# Altium PCB USB_nRF24L01_gateway.PcbDoc
Units mil, origin at the board's own origin, x right, y up, seen from the top; angles counter-clockwise.
Board outline 1771.65 x 787.4 mil, 2 copper layers (Top Layer, Bottom Layer); 36 components, 39 nets, 158 pads, 28 vias.
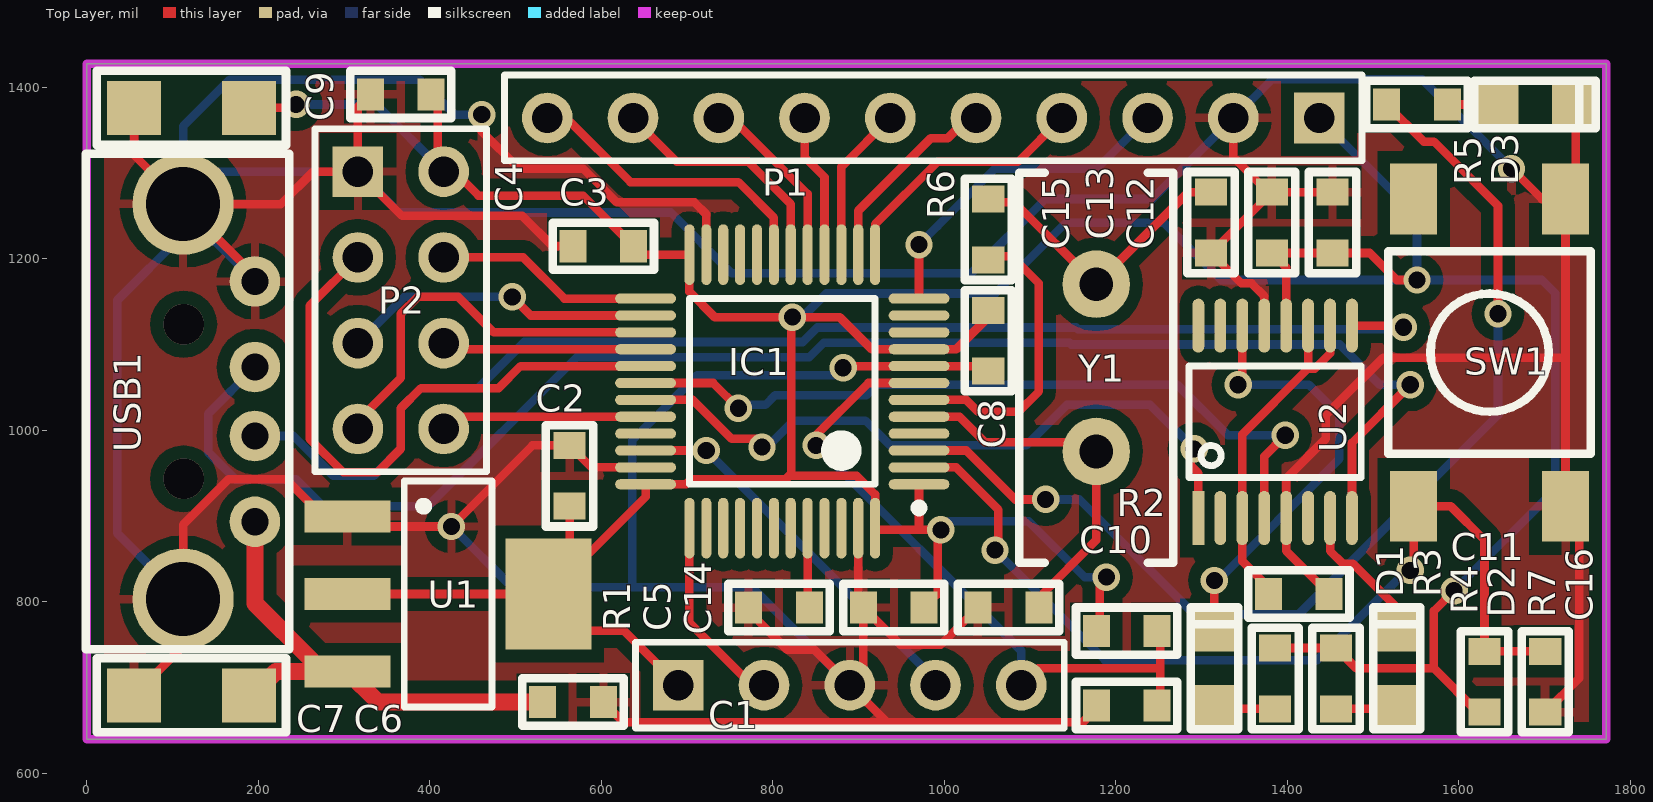
[diagram p0: Top Layer view]
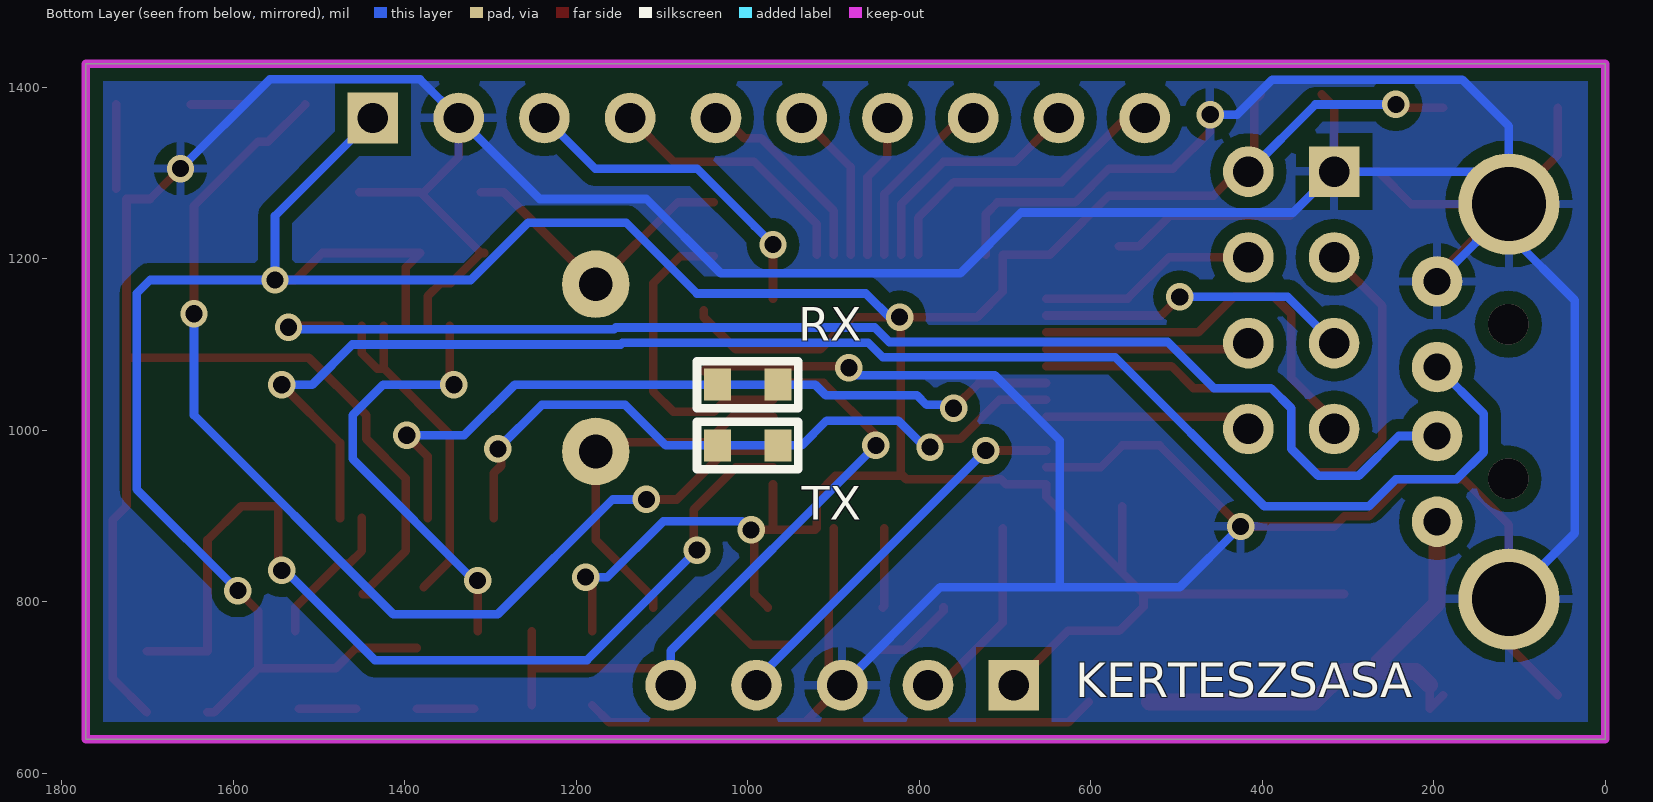
[diagram p1: Bottom Layer view, seen from below]

## Layer stack, top to bottom
Top Layer: signal copper 1.4
Dielectric: dielectric 12.6, FR-4, Dk 4.8
Bottom Layer: signal copper 1.4

## Board outline
0,640 0,1427.4 1771.65,1427.4 1771.65,640

## Design rules (kind name [scope] priority, off if disabled: settings)
Clearance Clearance_to_poly [All vs (InNamedPolygon('Bottom GND'))  or (InNamedPolygon('Top GND'))] p1: gap=15
Clearance Clearance_to_uc [HasFootprint('LQFP48_N') vs HasFootprint('LQFP48_N')] p2: gap=4
Clearance [All] p3: gap=8
MinimumSolderMaskSliver [All] p1: minsoldermaskwidth=8
PolygonConnect [All] p1: connectstyle=Relief reliefconductorwidth=10 reliefentries=4 polygonreliefangle="90 Angle"
RoutingVias [All] p1: holewidth=20 width=32 viastyle="Through Hole" minholewidth=20 minwidth=32 maxholewidth=28 maxwidth=50
SilkToSilkClearance [All] p1: silktosilkclearance=0
SilkscreenOverComponentPads [All] p1: minsilkscreentomaskgap=0
SolderMaskExpansion [All] p1: expansion=4
Width [All] p1: maxlimit=50 minlimit=10 preferedwidth=10
25 further rules are at their usual default settings.

## Components (designator, comment, footprint, x,y, rotation, side; value= is the part's Value field where it differs from the comment)
C1 "SWD" SWD 889.76,702.99 r90 top
C2 "100nF" FP_0603_CAP_080 562.99,947.09 r270 top
C3 "100nF" FP_0603_CAP_080 602.36,1214.8 r0 top
C4 "100nF" FP_0603_CAP_080 366.14,1391.97 r0 top
C5 "100nF" FP_0603_CAP_080 940.94,793.54 r0 top
C6 "100nF" FP_0603_CAP_080 566.93,683.31 r180 top
C7 "10uF" FP_1206_CAP_085 122.05,691.18 r180 top
C8 "100nF" FP_0603_CAP_080 1051.18,1104.57 r270 top
C9 "10uF" FP_1206_CAP_085 122.05,1376.22 r0 top
C10 "100nF" FP_0603_CAP_080 1212.6,679.37 r180 top
C11 "100nF" FP_0603_CAP_080 1413.39,809.29 r0 top
C12 "1uF" FP_0603_CAP_080 1452.76,1242.36 r90 top
C13 "100nF" FP_0603_CAP_080 1381.89,1242.36 r90 top
C14 "22p" FP_0603_CAP_080 1074.8,793.54 r0 top
C15 "22p" FP_0603_CAP_080 1311.02,1242.36 r90 top
C16 "100nF" FP_0603_CAP_080 1700.79,706.93 r270 top
D1 "LED_RED" FP_0805_LED_RED 1314.96,683.31 r90 top
D2 "LED_RED" FP_0805_LED_RED 1527.56,683.31 r90 top
D3 "LED_RED" FP_0805_LED_RED 1649.61,1380.16 r0 top
IC1 "STM32F10x_TQFP48" LQFP48_N 811.02,1045.51 r180 top
P1 "Header 10" HDR1X10 1437.01,1364.41 r180 top
P2 "Header 4X2" FP_CONN8_SZK_ALLO 366.14,1151.81 r270 top
R1 "10k" FP_0603_RES 807.09,793.54 r0 top
R2 "10k" FP_0603_RES 1212.6,765.98 r0 top
R3 "330R" FP_0603_RES 1385.83,710.87 r270 top
R4 "330R" FP_0603_RES 1456.69,710.87 r270 top
R5 "330R" FP_0603_RES 1551.18,1380.16 r0 top
R6 "390R" FP_0603_RES 1051.18,1234.49 r90 top
R7 "10k" FP_0603_RES 1629.92,706.93 r90 top
RX "0R" FP_0603_RES 1000,1053.39 r180 bottom
SW1 "SW1" FP_TACTBTN 1724.41,1269.92 r0 top
TX "0R" FP_0603_RES 1000,982.52 r180 bottom
U1 "LD1117xx" SUPPLY_SOT223 421.26,809.29 r0 top
U2 "FT230XS" Digital_TSSOP16 1385.83,1010.08 r90 top
USB1 "USB connector" USB_A_th 200,1033.7 r0 top
Y1 "8MHz Quartz HC49" FP_CRYSTAL_HC49_TH 1177.17,1073.07 r270 top

## Footprints (in the part's own frame and the unit in brackets; to place one, negate y for a bottom-side part, rotate by r counter-clockwise, add the part's x,y. Pads: shape width x height; smd on the part's side, far side on the other; paste and mask are expansions set on the pad)
Digital_TSSOP16 [mm] "TSSOP 16 l"
  rect 1.6x0.35 smd: 1(-2.85,2.275)
  oval 1.6x0.35 smd: 2(-2.85,1.625) 3(-2.85,0.975) 4(-2.85,0.325) 5(-2.85,-0.325) 6(-2.85,-0.975) 7(-2.85,-1.625) 8(-2.85,-2.275) 9(2.85,-2.275) 10(2.85,-1.625) 11(2.85,-0.975) 12(2.85,-0.325) 13(2.85,0.325) 14(2.85,0.975) 15(2.85,1.625) 16(2.85,2.275)
  silkscreen extent -1.65,-2.55 1.65,2.55, body extent -3.23,-2.56 3.23,2.54, height 1.35
FP_0603_CAP_080 [mm] "0.8mm magas 0603 kapacitás"
  rect 0.8x0.95 smd: 1(-0.9,0) 2(0.9,0)
  silkscreen extent -1.5,-0.7 1.5,0.7, body extent -0.8,-0.4 0.76,0.4, height 0.8
FP_0603_RES [mm] "0603 ellenállás"
  rect 0.8x0.95 smd: 1(-0.9,0) 2(0.9,0)
  silkscreen extent -1.5,-0.7 1.5,0.7, body extent -0.8,-0.4 0.8,0.4, height 0.44
FP_0805_LED_RED [mm] "0805 méretû piros LED"
  rect 1.2x1.3 smd: A(-0.1,0) K(2.1,0)
  silkscreen extent -0.8,-0.7 2.8,0.7, body extent 0.01,-0.63 2.03,0.62, height 1.1
FP_1206_CAP_085 [mm] "1206 kapacitás 0.85 mm"
  rect 1.6x1.6 smd: 1(-1.7,0) 2(1.7,0)
  silkscreen extent -2.8,-1.1 2.8,1.1, body extent -1.52,-0.79 1.58,0.79, height 0.85
FP_CONN8_SZK_ALLO [mm] "Connector; Header; 4x2 Position"
  rect 1.5x1.5 hole 0.9: 1(-3.81,-1.27)
  round 1.5 hole 0.9: 2(-3.81,1.27) 3(-1.27,-1.27) 4(-1.27,1.27) 5(1.27,-1.27) 6(1.27,1.27) 7(3.81,-1.27) 8(3.81,1.27)
  silkscreen extent -5.08,-2.54 5.08,2.54
FP_CRYSTAL_HC49_TH [mm] "HC49/SMD"
  round 2 hole 1: 1(-2.476,0) 2(2.477,0)
  silkscreen extent -5.78,-2.29 5.78,2.29, body extent -5.49,-2.29 5.49,2.21, height 3.6
FP_TACTBTN [mm] "TE CONNECTIVITY / ALCOSWITCH - FSM2JSMA"
  rect 1.4x2.1 smd: 1(0,0) 2(0,-9.1) 3(-4.5,0) 4(-4.5,-9.1)
  silkscreen extent -5.25,-7.55 0.75,-1.55, body extent -5.23,-8.57 0.77,-0.42, height 5
HDR1X10 [mm] "Connector; Header; 10 Position"
  rect 1.5x1.5 hole 0.9: 1(0,0)
  round 1.5 hole 0.9: 2(2.54,0) 3(5.08,0) 4(7.62,0) 5(10.16,0) 6(12.7,0) 7(15.24,0) 8(17.78,0) 9(20.32,0) 10(22.86,0)
  silkscreen extent -1.27,-1.27 24.13,1.27
LQFP48_N [mm] "Thin QFP, 48-Leads, Body 7x7mm, Pitch 0.5mm, IPC Medium Density"
  oval 1.8x0.3 smd: 1(-4.05,2.75) 2(-4.05,2.25) 3(-4.05,1.75) 4(-4.05,1.25) 5(-4.05,0.75) 6(-4.05,0.25) 7(-4.05,-0.25) 8(-4.05,-0.75) 9(-4.05,-1.25) 10(-4.05,-1.75) 11(-4.05,-2.25) 12(-4.05,-2.75) 25(4.05,-2.75) 26(4.05,-2.25) 27(4.05,-1.75) 28(4.05,-1.25) 29(4.05,-0.75) 30(4.05,-0.25) 31(4.05,0.25) 32(4.05,0.75) 33(4.05,1.25) 34(4.05,1.75) 35(4.05,2.25) 36(4.05,2.75)
  oval 0.3x1.8 smd: 13(-2.75,-4.05) 14(-2.25,-4.05) 15(-1.75,-4.05) 16(-1.25,-4.05) 17(-0.75,-4.05) 18(-0.25,-4.05) 19(0.25,-4.05) 20(0.75,-4.05) 21(1.25,-4.05) 22(1.75,-4.05) 23(2.25,-4.05) 24(2.75,-4.05) 37(2.75,4.05) 38(2.25,4.05) 39(1.75,4.05) 40(1.25,4.05) 41(0.75,4.05) 42(0.25,4.05) 43(-0.25,4.05) 44(-0.75,4.05) 45(-1.25,4.05) 46(-1.75,4.05) 47(-2.25,4.05) 48(-2.75,4.05)
  silkscreen extent -4.18,-2.75 2.75,3.57, body extent -3.5,-3.5 3.5,3.5, height 1.6
SUPPLY_SOT223 [mm] "SOT223 package, 3 leads"
  rect 2.55x0.95 smd: 1(-2.975,2.3) 2(-2.975,0) 3(-2.975,-2.3)
  rect 2.55x3.3 smd: 2(2.975,0)
  silkscreen extent -1.3,-3.35 1.3,3.35, body extent -3.5,-3.25 3.5,3.25, height 1.65
SWD [mm]
  rect 1.5x1.5 hole 0.9: 1(0,5.08)
  round 1.5 hole 0.9: 2(0,2.54) 3(0,0) 4(0,-2.54) 5(0,-5.08)
  silkscreen extent -1.27,-6.35 1.27,6.35
USB_A_th [mm]
  round 1.5 hole 0.8: 1(-0.102,-3.56) 2(-0.102,-1.02) 3(-0.102,1.02) 4(-0.102,3.56)
  round 3 hole 2.2: 5(-2.228,5.85) 6(-2.228,-5.85)
  round 0.1 on Top Overlay: 7(0,0.002)
  silkscreen extent -5.11,-7.34 0.91,7.34, body extent -19.92,-6.3 0,6.31, height 3.2

## Part data
C1: "ARM SWD connector"
C2 C3 C4 C5 C6 C7 C8 C9 C10 C11 C12 C13 C14 C15 C16: library part Cap, "Capacitor"
D1 D2 D3: library part LED_R, "Typical LED"
P1: "Header, 10-Pin"
P2: "Header, 4-Pin, Dual row"
R1 R2 R3 R4 R5 R6 R7 RX TX: library part Res3, "Resistor"
U1: "LD1117xx 3,3V lin reg"
U2: "USB-SERIAL"
USB1: library part USB_B_TH, "USB B conn TH"
Y1: library part "XTAL HC49", "Standard HC49 quartz"

## Via types
v1: diameter 32, hole 20, Top Layer to Bottom Layer, 26 vias
v2: diameter 47.24, hole 47.24, Top Layer to Bottom Layer, 2 vias

## Nets (pads, with @x,y where several pads share a name; then routed paths per layer and width w, separated by ;. In a path a pad name is that pad's centre, name@x,y a point inside that pad or via, vN(x,y) a via of type N, cw(c..) or ccw(c..) an arc to the next point about the centre after c; other vN are vias at no path point)
3V3: C1.1 C2.2 C3.2 C4.2 C5.2 C8.1 C9.2 C12.1 C13.1 IC1.1 IC1.9 IC1.24 IC1.36 IC1.48 P1.1 P2.2 R2.1 R3.1 R4.1 R7.1 U1.2 U2.12 | length 5087.4
  Top Layer w10: C9.2 240.16,1376.22 v1(244.09,1380.16) ; U1.2@304.13,809.29 U1.2@538.39,809.29 ; C4.2 409.45,1384.09 409.45,1308.5 P2.2 428.74,1301.81 456.69,1273.86 578.74,1273.86 C3.2 647.64,1204.96 IC1.24 702.76,1161.65 732.29,1132.12 v1@830.71,1132.12 ; C2.2 U1.2@562.99,833.9 ; C1.1 655.91,736.85 626.38,766.38 566.54,766.38 538.39,794.53 U1.2@538.39,809.29 ; 818.9,947.09 897.64,947.09 919.29,925.43 IC1.48 ; IC1.48@921.26,884.09 v1(996.06,884.09) 992.13,880.16 992.13,809.29 C5.2 ; 970.47,886.06 IC1.1 ; C8.1 1051.18,1132.13 1013.78,1094.72 IC1.9 915.35,1094.72 877.95,1132.12 v1@830.71,1132.12 ; R2.1@1181.1,765.98 1181.1,821.1 v1(1188.98,828.98) ; R3.1 R4.1 1480.31,722.68 1570.87,722.68 ; U2.12 1398.62,1190.2 C13.1 C12.1 1496.06,1206.93 1527.56,1175.43 v1(1551.18,1175.43) ; v1(1594.49,813.23) 1570.87,789.61 1570.87,722.68 ; R7.1 1622.05,671.5 1570.87,722.68 ; U1.2@538.39,809.29 U1.2@562.99,833.9 ; U1.2@562.99,833.9 651.57,922.48 IC1.36 698.82,937.24 704.72,943.15 814.96,943.15 821.39,949.58 821.39,1122.81 v1@830.71,1132.12
  Bottom Layer w10: v1(244.09,1380.16) 337.8,1380.16 P2.2 ; v1@830.71,1132.13 832.67,1130.16 862.2,1159.68 1059.06,1159.68 1141.73,1242.36 1255.91,1242.36 1322.83,1175.43 v1(1551.18,1175.43) ; v1(996.06,884.09) 1006.19,894.22 1098.28,894.22 1163.52,828.98 v1(1188.98,828.98) ; P1.1 1551.18,1250.24 v1(1551.18,1175.43) ; v1(1594.49,813.23) 1712.6,931.34 1712.6,1159.69 1696.85,1175.43 v1(1551.18,1175.43)
  other v1: 822.83,1132.13
5V: C6.2 C7.1 U1.3 USB1.1 | length 657.7
  Top Layer w10: C7.1 204.72,675.43 C7.1@204.72,702.99 ; U1.3@263.78,730.55 251.97,718.74 U1.3
  Top Layer w20: USB1.1 195.98,798.35 U1.3@263.78,730.55 ; C7.1@204.72,702.99 220.47,718.74 U1.3 339.57,683.31 C6.2
BOOT0: IC1.44 R1.2 | length 93.3
  Top Layer w10: IC1.44 840.55,795.51 R1.2
BTN: C16.1 IC1.2 R7.2 SW1.3 SW1.4 | length 1118.7
  Top Layer w10: IC1.2 1013.78,956.93 1062.99,907.72 1062.99,864.41 v1(1059.06,860.47) ; v1@1543.31,840.79 1547.24,840.79 SW1.4 1590.55,911.65 1629.92,872.28 R7.2 C16.1
  Bottom Layer w10: v1(1059.06,860.47) 1187.29,732.24 1434.76,732.24 v1@1543.31,840.79
  other v1: 1543.31,836.85
GND: C1.3 C2.1 C3.1 C4.1 C5.1 C6.1 C7.2 C8.2 C9.1 C10.2 C11.2 C12.2 C13.2 C14.1 C15.1 C16.2 D3.K IC1.8 IC1.23 IC1.35 IC1.47 P1.2 P2.1 R1.1 SW1.1 SW1.2 U1.1 U2.5 U2.13 USB1.4 USB1.5 USB1.6 | length 9019.3
  Top Layer w10: C7.2 112.29,748.35 USB1.6 112.29,890.09 165.35,943.15 232.28,943.15 275.59,899.84 U1.1 315.94,888.03 v1(425.2,888.03) 519.69,982.52 C2.1 588.58,956.93 IC1.35 ; C9.1 55.12,1321.18 USB1.5 ; USB1.4 196,1180.3 USB1.5 ; C4.1 316.14,1377.4 P2.1 ; v1(460.63,1368.35) 460.63,1348.66 503.94,1305.35 578.74,1305.35 618.11,1265.98 708.66,1265.98 722.44,1252.2 IC1.23 ; C3.1 543.31,1214.8 507.87,1250.24 367.72,1250.24 P2.1 ; C6.1 625.98,659.68 933.07,659.68 ; R1.1 771.65,789.61 816.93,744.33 848.43,744.33 C1.3 ; v1(881.89,1073.07) 883.86,1075.04 IC1.8 1045.28,1075.04 C8.2 ; C5.1@899.61,799.45 IC1.47 ; C14.1 996.06,750.24 948.82,750.24 C5.1 905.51,718.74 C1.3 ; C10.2@1181.1,679.37 1161.42,659.68 933.07,659.68 ; C15.1@1307.09,1206.93 C15.1 ; P1.2 1337.01,1318.74 C13.2@1379.92,1275.83 ; U2.13 1373.03,1156.73 1358.27,1171.5 1346.46,1171.5 C15.1 ; C11.2@1440.94,809.29 C11.2 ; C11.2@1440.94,817.17 1398.62,859.49 U2.5 1398.62,944.13 1444.88,990.39 1444.88,1017.95 1511.81,1084.88 1724.41,1084.88 ; C12.2 C13.2 C13.2@1379.92,1275.83 ; v1@1665.35,1301.42 1696.85,1269.92 SW1.1 1724.41,1084.88 ; C16.2 1740.16,710.87 1740.16,895.91 SW1.2 1724.41,1084.88 ; SW1.1@1736.22,1281.73 D3.K@1736.22,1380.16 ; USB1.5 226.38,1264.02 264.17,1301.81 P2.1 ; C1.3 933.07,659.68 ; C15.1 C13.2@1379.92,1275.83
  Bottom Layer w10: USB1.6 35.43,880.24 35.43,1151.81 112.28,1228.66 USB1.5 112.28,1354.65 166.8,1409.16 388.32,1409.16 429.13,1368.35 v1(460.63,1368.35) ; USB1.4 150.08,1219.78 150.08,1301.81 P2.1 363.78,1254.17 681.1,1254.17 751.97,1183.31 1031.5,1183.31 1118.11,1269.92 1242.52,1269.92 P1.2 1382,1409.4 1557.37,1409.4 v1@1665.35,1301.42 ; v1(425.2,888.03) 496.06,817.17 635.83,817.17 ; v1(881.89,1073.07) 873.2,1064.39 711.79,1064.39 635.83,988.43 635.83,817.17 ; C1.3 775.59,817.17 635.83,817.17
  other v1: 1661.42,1305.35
GPOI_1: IC1.12 P1.3 | length 390.7
  Top Layer w10: IC1.12 v1(970.47,1216.77)
  Bottom Layer w10: v1(970.47,1216.77) 992.13,1238.43 1059.06,1305.35 1177.95,1305.35 P1.3
GPOI_2: IC1.13 P1.4 | length 304.5
  Top Layer w10: IC1.13 919.29,1240.39 992.13,1313.23 1085.83,1313.23 P1.4
GPOI_3: IC1.14 P1.5 | length 233.4
  Top Layer w10: IC1.14 899.61,1256.14 984.25,1340.79 1003.94,1340.79 1027.56,1364.41 P1.5
GPOI_4: IC1.15 P1.6 | length 183.1
  Top Layer w10: IC1.15 879.92,1307.32 P1.6
GPOI_5: IC1.16 P1.7 | length 169.1
  Top Layer w10: P1.7 837.01,1318.74 860.24,1295.51 IC1.16
GPOI_6: IC1.17 P1.8 | length 211.1
  Top Layer w10: P1.8 751.97,1364.41 840.55,1275.83 IC1.17
GPOI_7: IC1.18 P1.9 | length 284.5
  Top Layer w10: P1.9 688.19,1313.23 771.65,1313.23 820.87,1264.02 IC1.18
GPOI_8: IC1.19 P1.10 | length 355.6
  Top Layer w10: P1.10 559.06,1364.41 633.86,1289.61 759.84,1289.61 801.18,1248.27 IC1.19
LED: IC1.3 R5.1 | length 1273.4
  Top Layer w10: IC1.3 1025.59,976.61 1082.68,919.53 v1(1118.11,919.53) ; R5.1 1559.06,1336.85 1570.87,1336.85 1645.67,1262.05 v1(1645.67,1136.06)
  Bottom Layer w10: v1(1118.11,919.53) 1157.48,919.53 1291.34,785.67 1413.39,785.67 1645.67,1017.95 v1(1645.67,1136.06)
MISO: IC1.27 P2.7 | length 465.7
  Top Layer w10: P2.7 316.14,1011.26 366.14,1061.26 366.14,1136.06 385.83,1155.75 433.07,1155.75 474.41,1114.41 IC1.27
MOSI: IC1.28 P2.6 | length 238.4
  Top Layer w10: P2.6 423.23,1094.72 IC1.28
NetC11_1: C11.1 U2.3 U2.10 U2.11 | length 415
  Top Layer w10: C11.1@1377.95,817.17 1347.44,847.68 U2.3 1347.44,995.32 1424.21,1072.09 ; U2.11 1424.21,1072.09 ; U2.10 1449.8,1089.8 1432.09,1072.09 1424.21,1072.09
NetC15_2: C15.2 R6.2 Y1.1 | length 355.6
  Top Layer w10: R6.2@1039.37,1265.98 1081.75,1265.98 Y1.1 1284.39,1277.8 C15.2
NetD1_A: D1.A R3.2 | length 66.9
  Top Layer w10: D1.A@1318.9,675.43 R3.2
NetD1_K: D1.K U2.14 | length 516
  Top Layer w10: D1.K v1@1314.96,821.1 ; v1(1342.52,1053.39) 1347.44,1058.31 U2.14
  Bottom Layer w10: v1@1314.96,821.1 1460.63,966.77 1460.63,1017.95 1425.2,1053.39 v1(1342.52,1053.39)
  other v1: 1314.96,825.04
NetD2_A: D2.A R4.2 | length 66.9
  Top Layer w10: R4.2 D2.A@1523.62,675.43
NetD2_K: D2.K U2.7 | length 171
  Top Layer w10: U2.7 1449.8,859.49 1464.57,844.72 1476.38,844.72 1527.56,793.54 D2.K
NetD3_A: D3.A R5.2 | length 63
  Top Layer w10: R5.2 D3.A@1649.61,1380.16
NRF24_CE: IC1.29 P2.3 | length 721.8
  Top Layer w10: P2.3 259.84,1145.51 259.84,990.39 299.21,951.02 338.58,951.02 366.14,978.58 366.14,1025.83 389.76,1049.45 480.32,1049.45 505.91,1075.04 IC1.29
NRF24_IRQ: IC1.32 P2.8 | length 241.3
  Top Layer w10: P2.8 424.8,1001.81 438.98,1015.98 IC1.32
NRF24_SS: IC1.25 P2.4 | length 255.3
  Top Layer w10: P2.4 509.06,1201.81 557.09,1153.78 IC1.25
NRST: C1.5 C10.1 IC1.7 R2.2 | length 792.8
  Top Layer w10: v1(850.39,982.52) 850.39,994.33 911.42,1055.35 IC1.7 ; C1.5 1109.45,722.68 1251.97,722.68 ; C10.1@1251.97,679.37 1251.97,722.68 ; R2.2@1251.97,765.98 1251.97,722.68
  Bottom Layer w10: v1(850.39,982.52) 1089.76,743.15 C1.5
NTRST: IC1.40
OSC_IN: C14.2 IC1.5 Y1.2 | length 433.2
  Top Layer w10: IC1.5 1017.72,1015.98 1047.24,986.46 1166.26,986.46 Y1.2 1177.17,872.28 1110.24,805.35 C14.2
OSC_OUT: IC1.6 R6.1 | length 365.2
  Top Layer w10: IC1.6 1025.59,1035.67 1039.37,1021.89 1086.61,1021.89 1110.24,1045.51 1110.24,1171.5 1078.74,1202.99 R6.1@1039.37,1202.99
PROG_RX: IC1.31 TX.1 TX.2 U2.1 | length 828.3
  Top Layer w10: IC1.31 706.69,1035.67 751.97,990.39 787.4,990.39 v1@787.4,984.49 ; v1(1291.34,978.58) 1287.4,974.65 1287.4,958.9 1296.26,950.04 U2.1
  Bottom Layer w10: v1@787.4,984.49 787.4,974.65 824.28,1011.52 908.01,1011.52 937.01,982.52 TX.2 TX.1 1095.56,982.52 1142.8,1029.76 1240.16,1029.76 v1(1291.34,978.58)
  other v1: 787.4,980.55
PROG_TX: IC1.30 RX.1 RX.2 U2.4 | length 899.2
  Top Layer w10: IC1.30 730.31,1055.35 v1(759.84,1025.83) ; U2.4 1373.03,969.72 v1(1397.64,994.33)
  Bottom Layer w10: v1@759.84,1029.76 791.34,1029.76 802.58,1041.01 908.88,1041.01 921.26,1053.39 1271.65,1053.39 1330.71,994.33 v1(1397.64,994.33)
SCK: IC1.26 P2.5 | length 366.7
  Top Layer w10: v1(496.06,1155.75) 517.72,1134.09 IC1.26
  Bottom Layer w10: P2.5 370.08,1155.75 v1(496.06,1155.75)
TCK: C1.2 IC1.37 | length 227.4
  Top Layer w10: IC1.37 702.76,775.83 775.59,702.99 C1.2
TDI: IC1.38
TDO: IC1.39
TMS: C1.4 IC1.34 | length 455.2
  Top Layer w10: IC1.34 v1(722.44,976.61)
  Bottom Layer w10: v1(722.44,976.61) 989.76,709.29 C1.4
USB+: U2.8 USB1.3 | length 1832
  Top Layer w10: U2.8 1475.39,985.47 v1(1543.31,1053.39)
  Bottom Layer w10: USB1.3 141.73,1019.61 141.73,974.65 173.23,943.15 244.09,943.15 275.59,911.65 397.64,911.65 571.11,1085.13 842.3,1085.13 859.25,1102.07 1146.15,1102.07 1148.02,1100.2 1461.06,1100.2 1507.87,1053.39 v1(1543.31,1053.39)
USB-: U2.9 USB1.2 | length 1520.5
  Top Layer w10: U2.9 1533.46,1122.28 v1(1535.43,1120.32)
  Bottom Layer w10: USB1.2 240.94,993.54 287.4,947.09 334.65,947.09 366.14,978.58 366.14,1025.83 389.76,1049.45 456.53,1049.45 510.21,1103.13 834.85,1103.13 851.79,1120.07 1153.6,1120.07 1155.47,1118.2 1533.32,1118.2 v1(1535.43,1120.32)
pads on no net: IC1.4 IC1.10 IC1.11 IC1.20 IC1.21 IC1.22 IC1.33 IC1.41 IC1.42 IC1.43 IC1.45 IC1.46 U2.2 U2.6 U2.15 U2.16 USB1.7
copper on no net:
  other v2: 112.87,943.54 112.87,1123.86

## Polygon pours and split planes (outlines as drawn)
GND on Bottom Layer "BOTTOM GND" (solid, remove dead copper, pour order 4): 0,640 1771.65,640 1771.65,1427.4 0,1427.4
GND on Top Layer "TOP GND" (solid, remove dead copper, pour order 5): 0,640 1771.65,640 1771.65,1427.4 0,1427.4

## Keep-outs
Keep-Out Layer:
  the board outline again, w10

## Silkscreen, mask and mechanical layers (free items; w line width, h text height)
Bottom Overlay:
  text "KERTESZSASA" at 618.11,688.98 h40